# Altium PCB pcb.pcbdoc
Units mil, origin at the board's own origin, x right, y up, seen from the top; angles counter-clockwise.
Board outline 3815 x 5135 mil, 2 copper layers (Top Layer, Bottom Layer); 34 components, 21 nets, 103 pads, 18 vias.
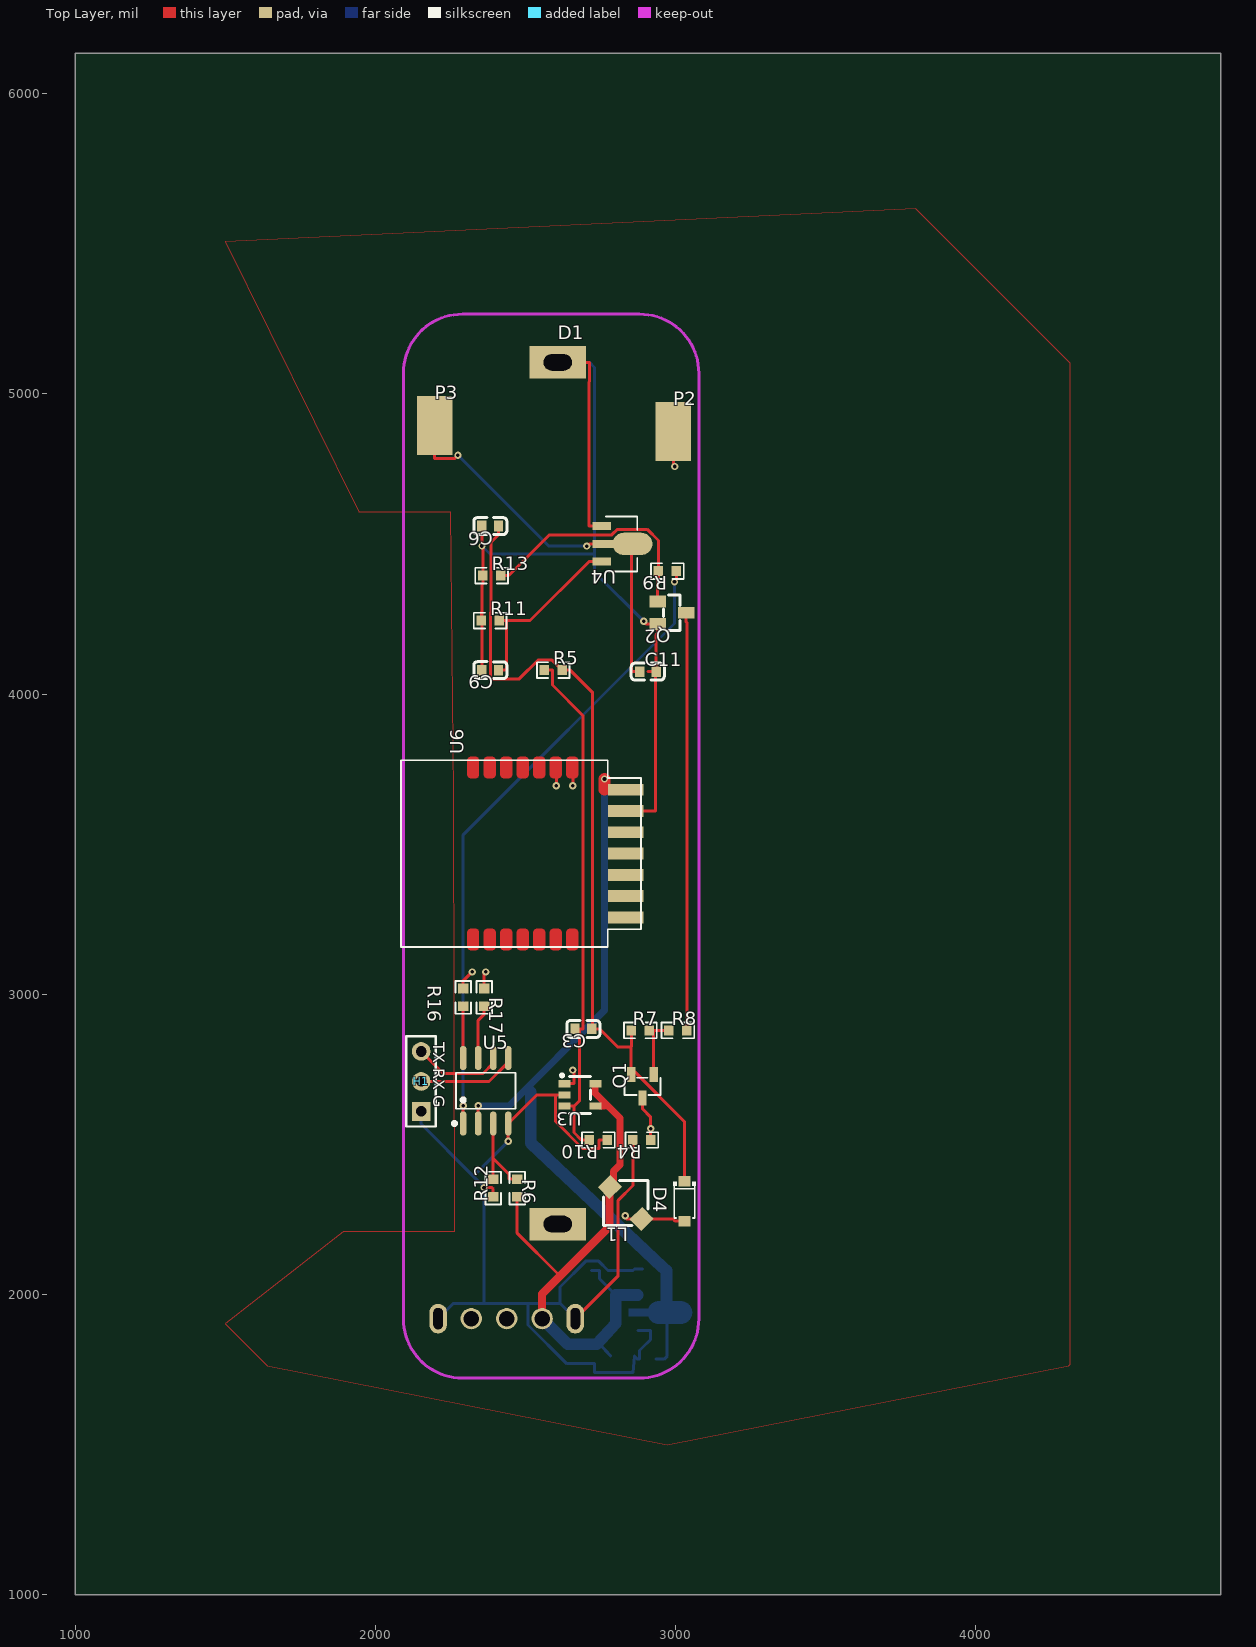
[diagram p0: Top Layer view]
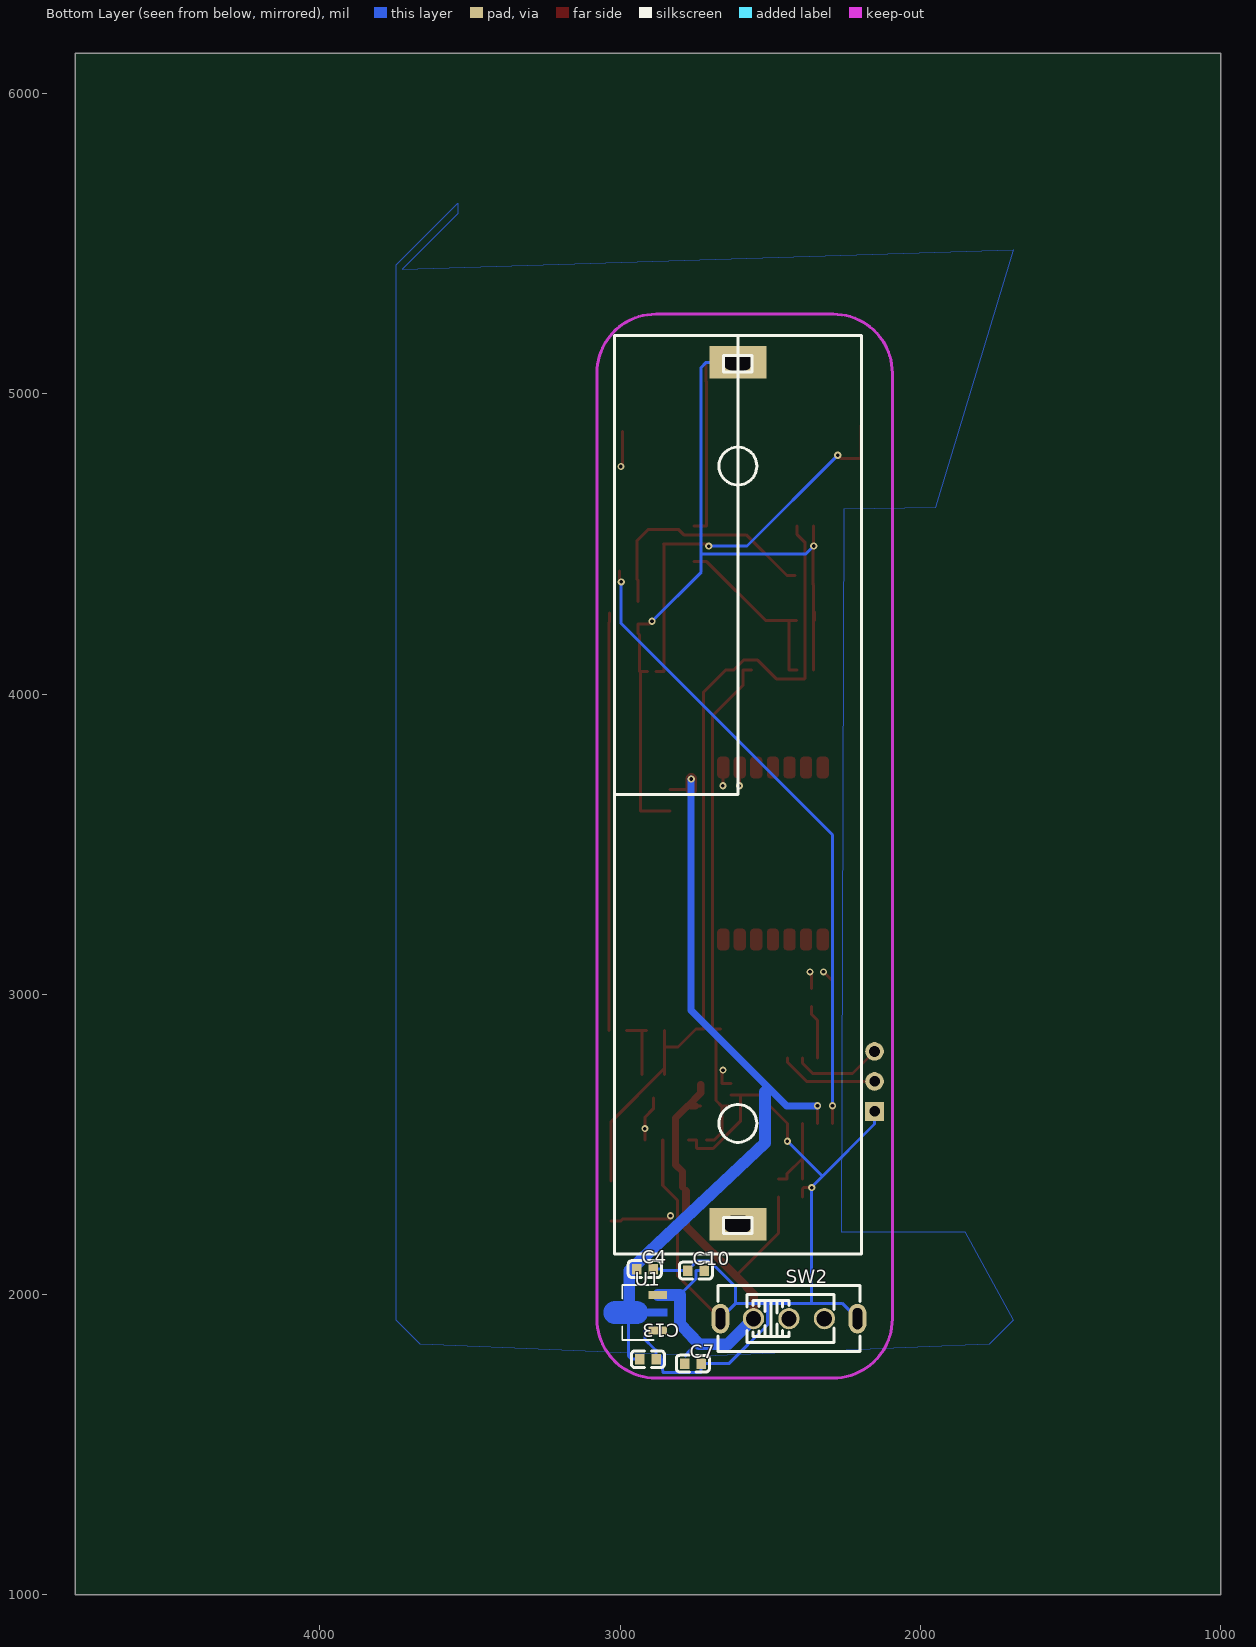
[diagram p1: Bottom Layer view, seen from below]

## Layer stack, top to bottom
Top Layer: signal copper (thickness not stored)
Dielectric: dielectric 12.6, FR-4, Dk 4.8
Bottom Layer: signal copper (thickness not stored)

## Board outline
4815,1000 1000,1000 1000,6135 4815,6135

## Components (designator, comment, footprint, x,y, rotation, side; value= is the part's Value field where it differs from the comment)
C3 "22pF" C0603#1 2692.5,2885 r180 top
C4 "106" C0603#2 2917.5,2085 r0 bottom
C6 "1uF" C0603#1 2382.5,4560 r180 top
C7 "106" C0603#2 2757.5,1770 r0 bottom
C9 "106" C0603#1 2382.5,4080 r180 top
C10 "4.7uF" C0603#2 2747.5,2080 r0 bottom
C11 "106" C0603#1 2907.5,4075 r0 top
C13 "1uF/16V" C0603#2 2907.5,1785 r180 bottom
D1 "18650" 18650直插 2607.5,3665 r0 top
D4 "MBR0530" MBR0530 2972.5,2215 r270 top
H1 "HDR-F-2.54_1x3" HDR-F-2.54_1X3 2152.5,2710 r90 top
L1 "6.8uH" CDRH3D23NP-6R8PC 2692.5,2360 r180 top
P2 "CON1" 电极片 2922.5,4985 r0 top
P3 "CON1" 电极片 2127.5,5005 r0 top
Q1 "AO3401A" AO3401A 2912.5,2775 r90 top
Q2 "CJ2312" CJ2312 2882.5,4295 r180 top
R4 "100K/1%" R0603 2887.5,2515 r180 top
R5 "100K/1%" R0603 2592.5,4080 r0 top
R6 "100K/1%" R0603 2472.5,2355 r270 top
R7 "103" R0603 2882.5,2880 r0 top
R8 "100K/1%" R0603 3007.5,2880 r0 top
R9 "R0603" R0603 2972.5,4410 r180 top
R10 "100K/1%" R0603 2742.5,2515 r180 top
R11 "100K/1%" R0603 2382.5,4245 r0 top
R12 "100K/1%" R0603 2392.5,2355 r90 top
R13 "104" R0603 2387.5,4395 r0 top
R16 "100R" R0603_NEW 2292.5,2990 r270 top
R17 "100R" R0603_NEW 2362.5,2990 r270 top
SW2 "SS-12F44-G5" SW-TH_SS-12F44-G5 2437.5,1920 r0 bottom
U1 "AMS1117-3.3_C347256" SOT-89_L4.5-W2.5-P1.50-LS4.2-BR 2927.5,1940 r0 bottom
U3 "TPS61040DBVR" TPS61040DBVR 2517.5,2655 r180 top
U4 "MD5333" MD5333 2832.5,4430 r180 top
U5 "STC8G1K08A-36I-SOP8" STC8G1K08A-36I-SOP8 2547.5,2660 r0 top
U6 "CBU" CBU1 2612.5,3185 r90 top

## Footprints (in the part's own frame and the unit in brackets; to place one, negate y for a bottom-side part, rotate by r counter-clockwise, add the part's x,y. Pads: shape width x height; smd on the part's side, far side on the other; paste and mask are expansions set on the pad)
18650直插 [mm]
  rect 4.8x2.76 hole 1.38 slot 2.4 at 0 deg: 1(0,-36.322) 2(0,36.576)
AO3401A [mm]
  rect 1.25x0.7 smd: 1(-1.058,-0.364) 2(-1.058,1.536) 3(-3.058,0.586)
  silkscreen extent -2.78,-0.94 -1.33,2.11
C0603#1 [mm]
  rect 0.8x0.9 smd: 1(-0.7,0) 2(0.7,0)
  silkscreen extent -1.41,-0.71 1.39,0.72
C0603#2 [mm]
  rect 0.8x0.9 smd: 1(0.7,0) 2(-0.7,0)
  silkscreen extent -1.39,-0.72 1.41,0.71
CBU1 [mm]
  round 0 smd: 1(-0.063,7.291) 2(-0.063,5.892) 3(-0.063,4.491) 4(-0.063,3.091) 5(-0.063,1.691) 6(-0.063,0.291) 7(-0.063,-1.108) 15(14.491,-1.108) 16(14.491,0.291) 17(14.491,1.691) 18(14.491,3.091) 19(14.491,4.491) 20(14.491,5.892) 21(14.491,7.291)
  rect 1x3 smd: 8(1.814,-5.609) 9(3.614,-5.609) 10(5.414,-5.609) 11(7.214,-5.609) 12(9.014,-5.609) 13(10.814,-5.609) 14(12.614,-5.609)
  Top Layer region: -0.963,-0.859 -0.89,-0.682 -0.713,-0.609 0.587,-0.609 0.764,-0.682 0.837,-0.859 0.837,-1.359 0.764,-1.535 0.587,-1.609 -0.713,-1.609 -0.89,-1.535 -0.963,-1.359
  Top Layer region: 15.391,7.041 15.318,6.865 15.141,6.791 13.841,6.791 13.664,6.865 13.591,7.041 13.591,7.541 13.664,7.718 13.841,7.791 15.141,7.791 15.318,7.718 15.391,7.541
  Top Layer region: 15.391,5.641 15.318,5.465 15.141,5.391 13.841,5.391 13.664,5.465 13.591,5.641 13.591,6.141 13.664,6.318 13.841,6.391 15.141,6.391 15.318,6.318 15.391,6.141
  Top Layer region: 15.391,4.241 15.318,4.065 15.141,3.991 13.841,3.991 13.664,4.065 13.591,4.241 13.591,4.741 13.664,4.918 13.841,4.991 15.141,4.991 15.318,4.918 15.391,4.741
  Top Layer region: 15.391,-1.359 15.318,-1.535 15.141,-1.609 13.841,-1.609 13.664,-1.535 13.591,-1.359 13.591,-0.859 13.664,-0.682 13.841,-0.609 15.141,-0.609 15.318,-0.682 15.391,-0.859
  Top Layer region: 15.391,0.041 15.318,-0.135 15.141,-0.209 13.841,-0.209 13.664,-0.135 13.591,0.041 13.591,0.541 13.664,0.718 13.841,0.791 15.141,0.791 15.318,0.718 15.391,0.541
  Top Layer region: 15.391,1.441 15.318,1.265 15.141,1.191 13.841,1.191 13.664,1.265 13.591,1.441 13.591,1.941 13.664,2.118 13.841,2.191 15.141,2.191 15.318,2.118 15.391,1.941
  Top Layer region: 15.391,2.841 15.318,2.665 15.141,2.591 13.841,2.591 13.664,2.665 13.591,2.841 13.591,3.341 13.664,3.518 13.841,3.591 15.141,3.591 15.318,3.518 15.391,3.341
  Top Layer region: -0.963,0.541 -0.89,0.718 -0.713,0.791 0.587,0.791 0.764,0.718 0.837,0.541 0.837,0.041 0.764,-0.135 0.587,-0.209 -0.713,-0.209 -0.89,-0.135 -0.963,0.041
  Top Layer region: -0.963,7.541 -0.89,7.718 -0.713,7.791 0.587,7.791 0.764,7.718 0.837,7.541 0.837,7.041 0.764,6.865 0.587,6.791 -0.713,6.791 -0.89,6.865 -0.963,7.041
  Top Layer region: -0.963,6.141 -0.89,6.318 -0.713,6.391 0.587,6.391 0.764,6.318 0.837,6.141 0.837,5.641 0.764,5.465 0.587,5.391 -0.713,5.391 -0.89,5.465 -0.963,5.641
  Top Layer region: -0.963,4.741 -0.89,4.918 -0.713,4.991 0.587,4.991 0.764,4.918 0.837,4.741 0.837,4.241 0.764,4.065 0.587,3.991 -0.713,3.991 -0.89,4.065 -0.963,4.241
  Top Layer region: -0.963,3.341 -0.89,3.518 -0.713,3.591 0.587,3.591 0.764,3.518 0.837,3.341 0.837,2.841 0.764,2.665 0.587,2.591 -0.713,2.591 -0.89,2.665 -0.963,2.841
  Top Layer region: -0.963,1.941 -0.89,2.118 -0.713,2.191 0.587,2.191 0.764,2.118 0.837,1.941 0.837,1.441 0.764,1.265 0.587,1.191 -0.713,1.191 -0.89,1.265 -0.963,1.441
  silkscreen extent -0.69,-6.91 15.11,13.39
CDRH3D23NP-6R8PC [mm]
  rect 1.5x1.4 smd rot 45: 1(-4.944,2.742) 2(-2.243,0.042)
  silkscreen extent -5.49,-0.51 -1.69,3.29
CJ2312 [mm]
  rect 1.4x1 smd: 1(-1.472,-0.339) 2(-1.472,1.561) 3(-3.872,0.611)
  silkscreen extent -3.37,-0.89 -1.97,2.11
HDR-F-2.54_1X3 [mil]
  rect 62x62 hole 35: 1(-100,0)
  round 62 hole 35: 2(0,0)
  round 62 hole 36: 3(100,0)
  silkscreen extent -150,-49 150,50
MBR0530 [mm]
  rect 0.88x0.99 smd: 1(-4.132,1.45) 2(-0.747,1.45)
  silkscreen extent -4.07,0.51 -1.03,2.39
MD5333 [mm]
  rect 1.575x0.672 smd: 1(2.004,-3.289) 3(2.004,-0.289)
  oval 3.372x1.898 smd: 2(-0.6,-1.789)
  rect 1.833x0.672 smd: 2(1.874,-1.789)
  silkscreen extent -1,-4.11 1.65,0.54
R0603 [mil]
  rect 31.75x34.02 smd: 1(-29.66,0) 2(29.66,0)
  silkscreen extent -55,-26 55,26
R0603_NEW [mil]
  rect 31.75x34.02 smd: 1(-29.66,0) 2(29.66,0)
  silkscreen extent -55,-26 55,26
SOT-89_L4.5-W2.5-P1.50-LS4.2-BR [mm]
  rect 1.575x0.672 smd: 1(-1.356,1.5) 3(-1.356,-1.5)
  round 0 smd: 2(1.356,-0.009)
  Top Layer region: 2.283,-0.959 0.429,-0.959 0.385,-0.958 0.34,-0.955 0.296,-0.949 0.252,-0.942 0.208,-0.933 0.165,-0.921 0.123,-0.908 0.081,-0.893 0.04,-0.875 0,-0.856 -0.04,-0.835 -0.078,-0.812 -0.115,-0.788 -0.151,-0.761 -0.185,-0.733 -0.219,-0.704 -0.251,-0.673 -0.281,-0.64 -0.31,-0.606 -0.337,-0.571 -0.362,-0.534 -0.386,-0.497 -0.408,-0.458 -0.428,-0.418 -0.447,-0.339 -2.144,-0.339 -2.144,0.321 -0.447,0.321 -0.428,0.401 -0.408,0.44 -0.386,0.479 -0.362,0.517 -0.337,0.553 -0.31,0.588 -0.281,0.622 -0.251,0.655 -0.219,0.686 -0.185,0.716 -0.151,0.744 -0.115,0.77 -0.078,0.795 -0.04,0.818 0,0.839 0.04,0.858 0.081,0.875 0.123,0.89 0.165,0.904 0.208,0.915 0.252,0.925 0.296,0.932 0.34,0.937 0.385,0.94 0.429,0.941 2.283,0.941 2.328,0.94 2.372,0.937 2.416,0.932 2.46,0.925 2.504,0.915 2.547,0.904 2.589,0.89 2.631,0.875 2.672,0.858 2.713,0.839 2.752,0.818 2.79,0.795 2.827,0.77 2.863,0.744 2.898,0.716 2.931,0.686 2.963,0.655 2.993,0.622 3.022,0.588 3.049,0.553 3.075,0.517 3.098,0.479 3.12,0.44 3.141,0.401 3.159,0.36 3.175,0.318 3.189,0.276 3.202,0.233 3.212,0.19 3.22,0.146 3.227,0.102 3.231,0.058 3.233,0.013 3.233,-0.031 3.231,-0.076 3.227,-0.12 3.22,-0.164 3.212,-0.208 3.202,-0.251 3.189,-0.294 3.175,-0.336 3.159,-0.377 3.141,-0.418 3.12,-0.458 3.098,-0.497 3.075,-0.534 3.049,-0.571 3.022,-0.606 2.993,-0.64 2.963,-0.673 2.931,-0.704 2.898,-0.733 2.863,-0.761 2.827,-0.788 2.79,-0.812 2.752,-0.835 2.713,-0.856 2.672,-0.875 2.631,-0.893 2.589,-0.908 2.547,-0.921 2.504,-0.933 2.46,-0.942 2.416,-0.949 2.372,-0.955 2.328,-0.958
  silkscreen extent -1,-2.33 1.65,2.33
STC8G1K08A-36I-SOP8 [mil]
  oval 22.6x80.14 smd: 1(-254.98,-89.93) 2(-204.98,-89.93) 3(-154.98,-89.93) 4(-104.98,-89.93) 5(-104.98,128) 6(-154.98,128) 7(-204.98,128) 8(-254.98,128)
  silkscreen extent -290,-96 -81,79
SW-TH_SS-12F44-G5 [mm]
  round 1.8 hole 1.3: 1(3,0) 2(0,0) 3(-3,0)
  oval 1.5x2.5 hole 0.8 slot 1.8 at 90 deg: 4(-5.8,0) 5(5.8,0)
  silkscreen extent -6,-2.8 6,2.8
TPS61040DBVR [mm]
  rect 1x0.6 smd: 1(-2.869,-1.204) 2(-2.869,-0.254) 3(-2.869,0.696) 4(-5.469,0.696) 5(-5.469,-1.204)
  silkscreen extent -5.07,-2.03 -2.52,1.3
电极片 [mil]
  rect 118.11x196.85 smd: 1(70,-110)

## Via types
v1: diameter 24.02, hole 12.01, Top Layer to Bottom Layer, 14 vias
v2: diameter 24, hole 12, Top Layer to Bottom Layer, 4 vias

## Nets (pads, with @x,y where several pads share a name; then routed paths per layer and width w, separated by ;. In a path a pad name is that pad's centre, name@x,y a point inside that pad or via, vN(x,y) a via of type N, cw(c..) or ccw(c..) an arc to the next point about the centre after c; other vN are vias at no path point)
3V3: C4.1 C13.2 U1.2 U5.2 U6.14 | length 2611.7
  Top Layer w10: U5.2 v1(2342.52,2628.81) ; 2763.19,3681.61 U6.14
  Top Layer w39.37: 2763.19,3681.61 v1(2763.19,3717.34)
  Bottom Layer w10: C13.2 2961.88,1785 2971.88,1795 2971.88,1931.33 U1.2
  Bottom Layer w23.62: v1(2342.52,2628.81) 2444.91,2628.81 2763.19,2947.09 v1(2763.19,3717.34)
  Bottom Layer w39.37: 2517.5,2675 2517.5,2505 C4.1@2957.5,2090 ; 2969.32,2080 2969.32,1971.17 3005.15,1935.34
ADC: R6.1 R12.2 U5.3 | length 304
  Top Layer w10: R12.2 2392.5,2411.6 2392.52,2453.7 ; U5.3 2392.52,2453.7 ; R6.1 2444.42,2384.66 2444.42,2401.8 2392.52,2453.7
BTU_RXD1: R16.1 U6.16 | length 836.1
  Top Layer w10: 2292.5,3046.6 R16.1 2292.5,3045 v2(2322.5,3075) ; U6.16 2602.5,3754.03 v2(2602.5,3695)
  Mid-Layer 2 w10: v2(2322.5,3075) v2(2602.5,3695)
BTU_TXD1: R17.1 U6.15 | length 829.9
  Top Layer w10: 2362.5,3046.6 R17.1 2362.5,3070 v2(2367.5,3075) ; U6.15 2657.5,3754.14 v2(2657.5,3695)
  Mid-Layer 2 w10: v2(2367.5,3075) v2(2657.5,3695)
C11_1: C11.1 P3.1 U4.2 | length 1352.8
  Top Layer w10: P3.1 2197.5,4785.53 2264.74,4785.53 v1(2274.9,4795.69) ; v1(2704.34,4493.21) 2711.55,4500.42 2758.71,4500.42 U4.2@2853.12,4500.42 ; U4.2@2856.12,4500.42 U4.2@2853.12,4500.42 ; C11.1 2853.12,4075 U4.2@2853.12,4500.42
  Bottom Layer w10: v1(2274.9,4795.69) 2577.38,4493.21 v1(2704.34,4493.21)
GND: C4.2 C6.2 C7.2 C9.2 C10.1 C11.2 C13.1 D1.2 H1.1 Q2.2 R4.2 R10.1 R11.1 R12.1 R13.1 SW2.4 SW2.5 U1.1 U3.2 U4.1 U5.4 U6.13 | length 9329.5
  Top Layer w10: R11.1 2352.84,4273.08 2354.94,4273.08 ; C9.2 2354.94,4273.08 ; C6.2 2354.94,4531.21 2354.94,4493.35 2357.84,4490.45 R13.1 2357.84,4380.96 2357.84,4366.92 2354.94,4364.02 2354.94,4273.08 ; v1(2361.63,2356.48) 2388.31,2356.48 2392.5,2352.29 R12.1 ; v1(2442.52,2510.66) U5.4 2537.45,2665 2599.7,2665 ; D1.2 2713.06,5105 2713.06,5041.11 2711.55,5039.6 2711.55,4559.47 U4.1 ; U3.2@2630.45,2665 2599.7,2665 ; SW2.5@2665.85,1920 2808.65,2062.8 2808.65,2314.3 2857.84,2363.49 R4.2 ; R10.1 2745.21,2515 2745.21,2488.05 2744.07,2486.91 2689.92,2486.91 2599.7,2577.13 2599.7,2665 ; U6.13 2903.44,3610.74 ; v1(2893.53,4242.8) 2901.82,4234.51 2901.82,4233.54 2940.45,4233.54 2940.45,4202.79 2935.06,4197.4 C11.2 2908.24,4075 ; 2903.4,3610.7 2932.5,3610.7 2932.5,4075 2908.2,4075
  Mid-Layer 1 w10: v1@2354.94,4493.35 2442.52,4405.77 v1(2442.52,2510.66)
  Bottom Layer w10: H1.1 2152.5,2567.93 2326.15,2394.29 ; SW2.4 2260.18,1971.03 2361.63,1971.03 ; v1@2354.94,4493.35 2381.52,4466.77 2729.98,4466.77 ; v1(2442.52,2510.66) 2326.15,2394.29 ; D1.2 2713.06,5105 2729.98,5088.08 2729.98,4466.77 ; SW2.5@2665.85,1920 2614.82,1971.03 ; C7.2 2729.9,1740 2857.5,1740 2863.1,1795 2873.12,1785 C13.1 2879.94,1813.79 2889.94,1823.79 2916.17,1850.02 2916.17,1880.95 2879.67,1880.95 U1.1@2874.1,1880.95 ; C7.2 2637.76,1770 2508.65,1899.11 2508.65,1971.03 ; C4.2 2863.12,2085 2858.12,2080 C10.1 2743.7,2111.36 2700.55,2111.36 2614.82,2025.63 2614.82,1971.03 ; v1(2893.53,4242.8) 2729.98,4406.35 2729.98,4466.77 ; 2326.15,2394.29 2361.63,2358.8 v1(2361.63,2356.48) 2361.63,1971.03 ; 2361.63,1971.03 2508.65,1971.03 ; 2508.65,1971.03 2614.82,1971.03
  other v1: 2354.94,4493.35
P5.4: R9.1 U5.1 | length 2133.9
  Top Layer w10: U5.1 v1(2292.52,2629.09) ; v1(2996.3,4373.86) 2996.3,4376.06 3002.16,4381.92 R9.1
  Bottom Layer w10: v1(2292.52,2629.09) 2292.52,3070 2292.52,3531.63 2996.3,4235.41 v1(2996.3,4373.86)
Q2_3: Q2.3 R8.2 | length 1391.9
  Top Layer w10: Q2.3 3034.94,4240.19 3037.16,4237.97 R8.2
R7_2: Q1.1 R7.2 R8.1 | length 212.3
  Top Layer w10: R7.2 R7.2@2926.82,2880 ; Q1.1 2926.82,2769.02 R7.2@2926.82,2880 ; R8.1 R7.2@2926.82,2880
R9_2: Q2.1 R9.2 R13.2 | length 809.5
  Top Layer w10: R13.2 2444.1,4395 2579.74,4530.64 2787.63,4530.64 2806.18,4549.19 2905.49,4549.19 2942.84,4511.84 R9.2 2942.84,4381.92 2940.45,4379.53 Q2.1@2940.45,4308.35
R11_2: C9.1 R11.2 U4.3 | length 614.6
  Top Layer w10: C9.1 2436.88,4080 2436.88,4245 ; R11.2 2436.88,4245 ; U4.3 2711.55,4441.36 2515.19,4245 2436.88,4245
RXD: H1.2 U5.5 | length 330.6
  Top Layer w10: H1.2 2378.61,2710 2442.52,2773.91 U5.5
RXD1: R17.2 U5.7 | length 180.6
  Top Layer w10: U5.7 2342.52,2913.42 2362.5,2933.4 R17.2
TXD: H1.3 U5.6 | length 301.5
  Top Layer w10: H1.3 2225.7,2736.8 2358.28,2736.8 2392.52,2771.04 U5.6
TXD1: R16.2 U5.8 | length 172.3
  Top Layer w10: U5.8 R16.2
U3_1: D4.2 L1.1 U3.1 | length 844.7
  Top Layer w10: U3.1@2630.45,2702.4 2661.21,2702.4 2661.21,2743.84 v1(2657.19,2747.86) ; v1(2832.07,2262.91) 2835.69,2259.29 2835.69,2252.05 L1.1 2991.4,2252.05 2999.04,2244.41 D4.2
  Mid-Layer 1 w10: v1(2657.19,2747.86) 2832.07,2572.98 v1(2832.07,2262.91)
U3_3: C3.2 R5.1 R10.2 U3.3 | length 1737.6
  Top Layer w10: R5.1 2589.79,4080 2589.79,4030.3 2691.76,3928.33 2691.76,2885 C3.2@2678.35,2885 ; U3.3@2630.45,2627.6 2661.21,2627.6 ; C3.2 C3.2@2678.35,2885 ; R10.2 2685.9,2515 2661.21,2539.69 2661.21,2627.6 ; 2661.21,2627.6 2680.27,2646.66 2680.27,2883.08 C3.2@2678.35,2885
V_OUT: P2.1 Q1.3 R4.1 | length 2508.1
  Top Layer w10: Q1.3 2889.41,2618.93 2917.16,2591.18 v1(2917.16,2553.09) R4.1 ; P2.1 2992.5,4762.88 v1@2997.23,4758.15
  Mid-Layer 1 w10: v1(2917.16,2553.09) 2917.16,4678.08 v1@2997.23,4758.15
  other v1: 2997.23,4758.15
VBAT: D1.1 SW2.2 | length 447.3
  Mid-Layer 2 w10: 2501.94,2235 D1.1
  Mid-Layer 2 w39.37: SW2.2 2437.5,2170.56 2501.94,2235
VBAT_BOOST_8V: C3.1 C6.1 D4.1 Q1.2 R5.2 R7.1 | length 2818.2
  Top Layer w10: C6.1 2410.06,4531.21 2384.8,4505.95 2384.8,4273.09 2383.23,4271.52 2383.23,4054.13 2386.16,4051.2 2479.38,4051.2 2541.51,4113.33 2588.83,4113.33 R5.2 2649.1,4080 2722.5,4006.6 2722.5,2885 C3.1@2733.5,2885 ; C3.1 2733.47,2885 2746.88,2885 2806.95,2824.93 2852.01,2824.93 ; Q1.2 2852.01,2758.48 ; R7.1 2852.84,2825.76 2852.01,2824.93 ; D4.1 3029.6,2576.23 2852.01,2753.82 2852.01,2758.48 ; 2852.01,2758.48 2852.01,2824.93
VBAT_OUT: C7.1 C10.2 L1.2 R6.2 SW2.1 U1.3 U3.4 U3.5 | length 1917.6
  Top Layer w10: R6.2 2472.5,2204.5 2608.23,2068.78 ; U3.4 U3.4@2748.19,2627.6
  Top Layer w23.62: U3.5@2731.37,2699.8 2731.37,2671.13 2777.5,2625 ; U3.4@2748.19,2627.6 2763.57,2627.6 ; 2775.2,2627.8 2815.2,2587.8 2815.2,2432.7 2792.5,2410 L1.2@2792.5,2358.56
  Top Layer w27.56: SW2.1@2554.88,1906.22 2554.88,2002.38 2607.5,2055 2780.09,2227.59 L1.2@2780.09,2344.57
  Bottom Layer w10: C10.2 2746.76,2080 2746.76,2053.18 2800.88,1999.06 ; 2747.5,1835 2782.5,1797.6 2782.5,1795
  Bottom Layer w39.37: SW2.1 2640.6,1835 2724.6,1835 2727.5,1835 ; 2737.5,1835 2800.9,1903.4 2800.9,1999.1 ; 2800.88,1999.06 U1.3
pads on no net: SW2.3 U6.1 U6.2 U6.3 U6.4 U6.5 U6.6 U6.7 U6.8 U6.9 U6.10 U6.11 U6.12 U6.17 U6.18 U6.19 U6.20 U6.21

## Polygon pours and split planes (outlines as drawn)
GND on Bottom Layer (solid): 1690,5480 1950,4620 2255,4615 2262.5,2210 1852.5,2210 1690,1915 1770,1835 2722.5,1795 3665,1835 3745,1915 3745,5430 3540,5635 3540,5600 3725,5415
GND on Top Layer (solid): 1500,5507.5 1945,4607.5 2250,4607.5 2260,3667.5 2262.5,2210 1892.5,2210 1500,1902.5 1640,1762.5 2972.5,1500 4310,1762.5 4315,1767.5 4315,5102.5 3800,5617.5

## Keep-outs
Keep-Out Layer:
  lines w10: 2093.09,1919.33 ccw(c2289.94,1919.33) 2289.94,1722.48 ; 2093.09,5068.94 cw(c2289.94,5068.94) 2289.94,5265.79 ; 2880.49,1722.48 ccw(c2880.49,1919.33) 3077.34,1919.33 ; 2880.49,5265.79 cw(c2880.49,5068.94) 3077.34,5068.94

## Silkscreen, mask and mechanical layers (free items; w line width, h text height)
Top Overlay:
  text "TX RX G" at 2192.82,2840 h39.37 r270